# Altium PCB PCB3.PcbDoc
Units mm, origin at the board's own origin, x right, y up, seen from the top; angles counter-clockwise.
Board outline 152.4 x 101.6 mm, 2 copper layers (Top Layer, Bottom Layer); 32 components, 21 nets, 98 pads, 1 vias.
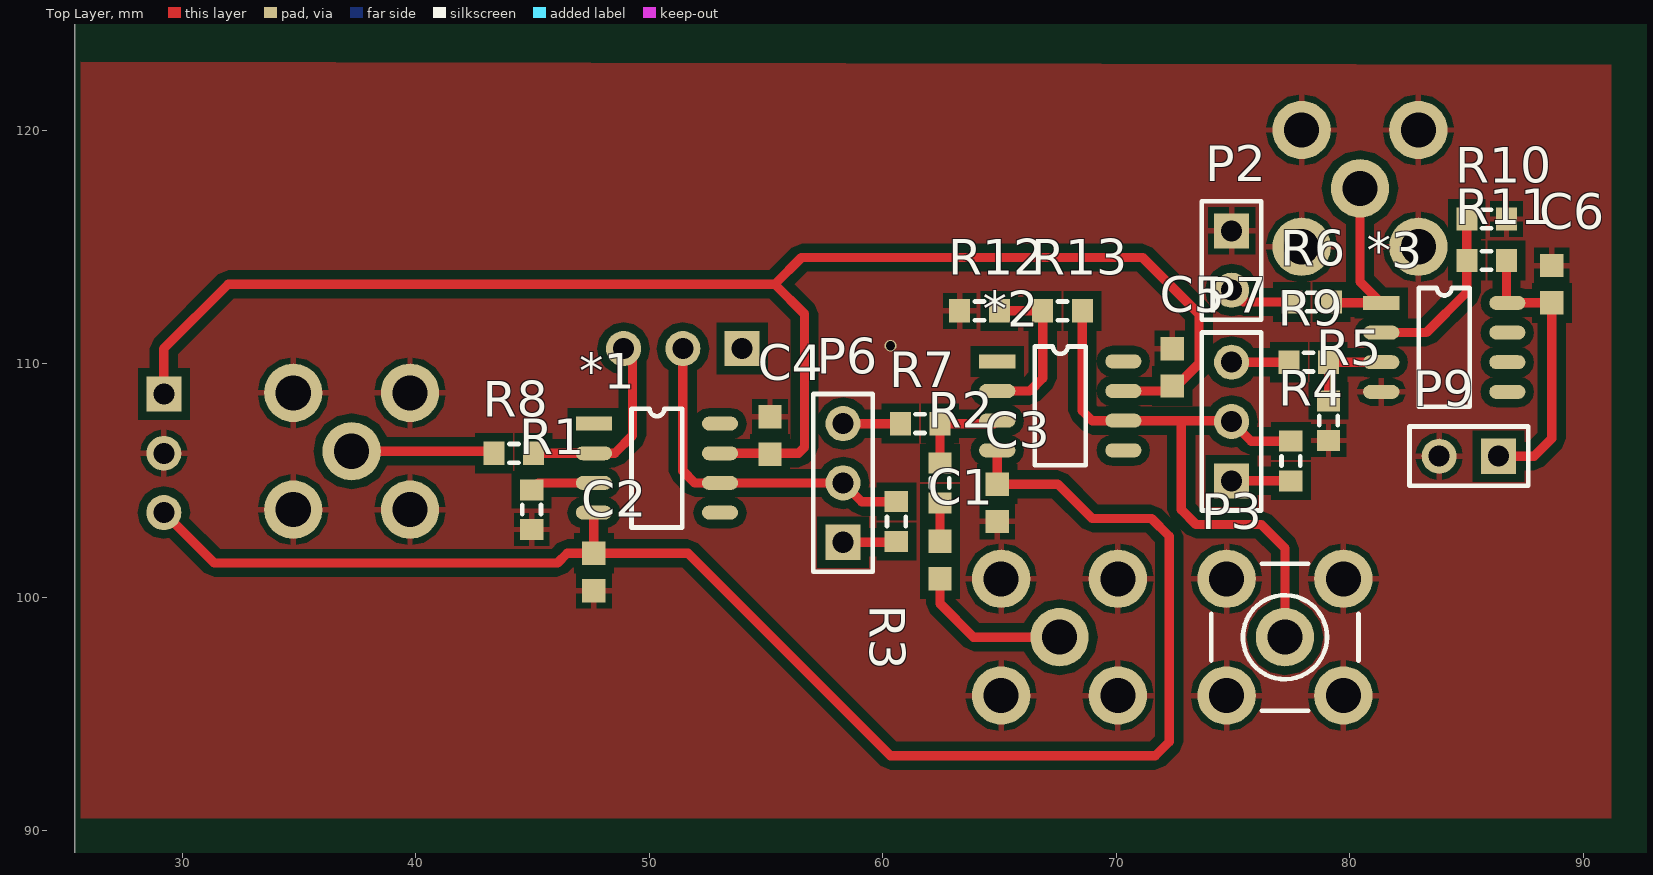
[diagram p0: Top Layer view]
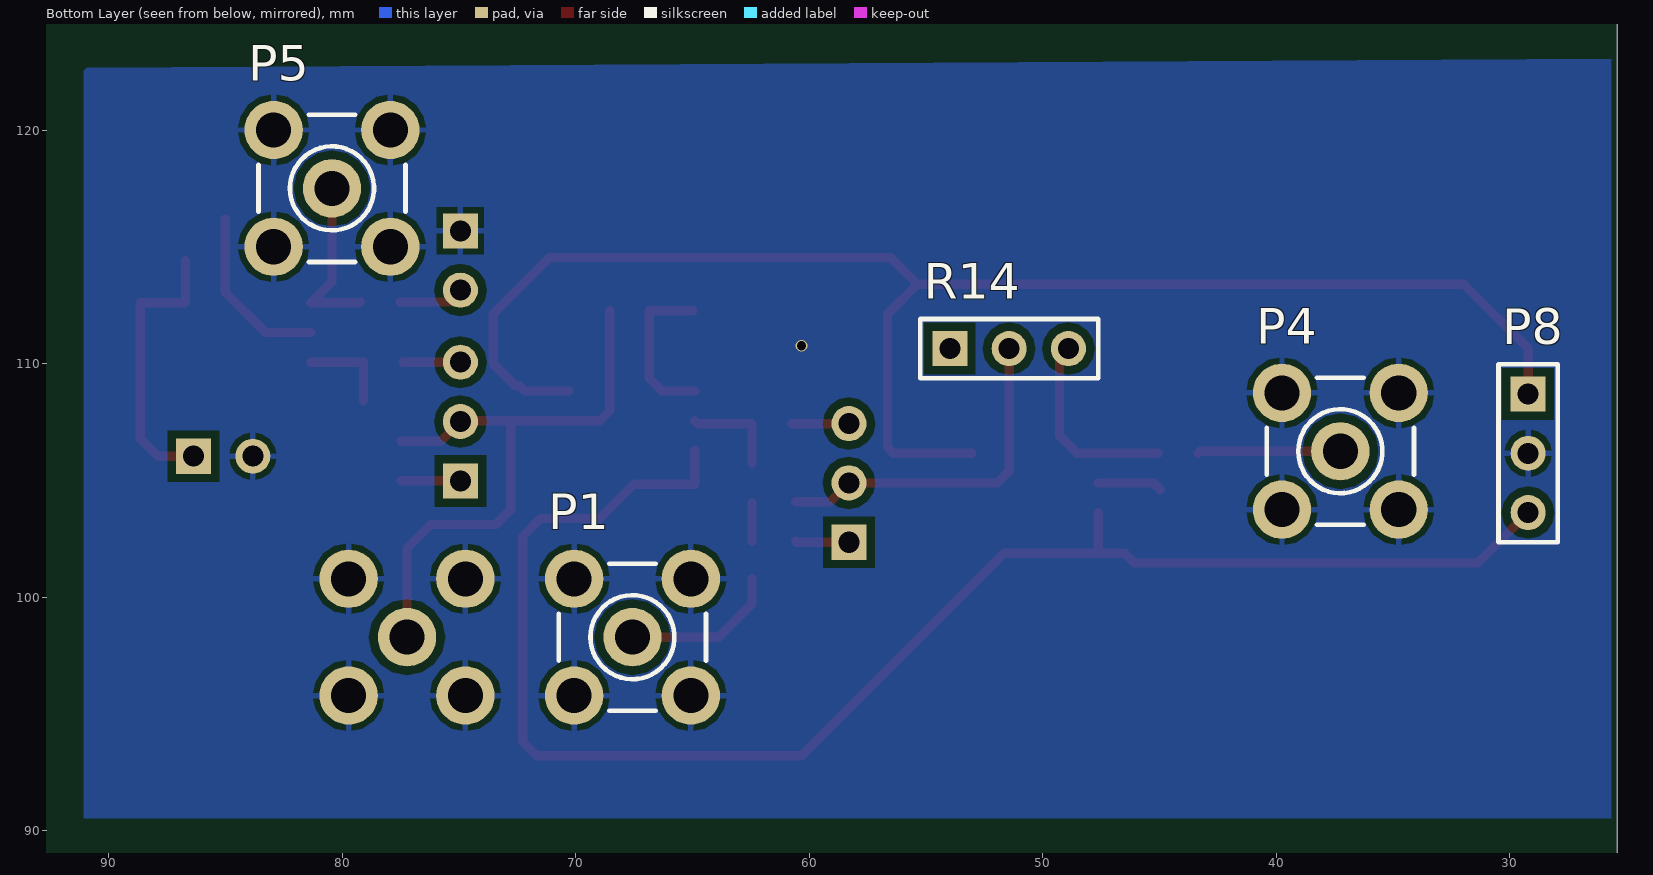
[diagram p1: Bottom Layer view, seen from below]

## Layer stack, top to bottom
Top Solder: solder mask 0.0102, Solder Resist, Dk 3.5
Top Layer: signal copper 0.0356
Dielectric 1: dielectric 0.32, FR-4, Dk 4.8
Bottom Layer: signal copper 0.0356
Bottom Solder: solder mask 0.0102, Solder Resist, Dk 3.5

## Board outline
25.4,25.4 177.8,25.4 177.8,127 25.4,127

## Design rules (kind name [scope] priority, off if disabled: settings)
Clearance [All] p1: gap=0.35 ignorepadtopadclearanceinfootprint=FALSE
PolygonConnect [All] p1: connectstyle=Relief reliefconductorwidth=0.254 reliefentries=4 polygonreliefangle="90 Angle" airgapwidth=0.254
RoutingVias [All] p1: holewidth=0.711 width=1.27 viastyle="Through Hole" minholewidth=0.711 minwidth=1.27 maxholewidth=0.711 maxwidth=1.27
SolderMaskExpansion [All] p1: expansion=0.102
Width [All] p1: maxlimit=0.8 minlimit=0.35 preferedwidth=0.4
30 further rules are at their usual default settings.

## Components (designator, comment, footprint, x,y, rotation, side; value= is the part's Value field where it differs from the comment)
*1 "OPA828" SOIC_8 47.625,107.442 r0 top
*2 "OPA828" SOIC_8 64.897,110.109 r0 top
*3 "TlV3202" SOIC_8 81.341,112.611 r0 top
C1 "Cap Semi" CAPC1608N 62.445,101.6 r90 top value=100pF
C2 "Cap Semi" CAPC1608N 47.625,101.092 r90 top value=100pF
C3 "Cap Semi" CAPC1608N 64.897,104.052 r270 top value=100pF
C4 "Cap Semi" CAPC1608N 55.167,106.934 r270 top value=100pF
C5 "Cap Semi" CAPC1608N 72.39,109.855 r90 top value=100pF
C6 "Cap Semi" CAPC1608N 88.646,113.411 r90 top value=100pF
P1 "SMB" SMB_V-RJ45 67.564,98.298 r180 bottom
P2 "Header 2" HDR1X2 74.93,115.697 r270 top
P3 "SMB" SMB_V-RJ45 77.216,98.298 r0 top
P4 "SMB" SMB_V-RJ45 37.251,106.259 r180 bottom
P5 "SMB" SMB_V-RJ45 80.431,117.515 r180 bottom
P6 "Header 3" HDR1X3 58.293,102.362 r90 top
P7 "Header 3" HDR1X3 74.93,104.991 r90 top
P8 "Header 3" HDR1X3 29.21,108.712 r270 bottom
P9 "Header 2H" HDR1X2 86.36,106.045 r180 top
R1 "Res Semi" RESC1608N 44.958,103.759 r90 top value=1K
R2 "Res Semi" RESC1608N 62.445,104.902 r90 top value=1K
R3 "Res Semi" RESC1608N 60.579,103.251 r270 top value=1K
R4 "Res Semi" RESC1608N 77.47,105.842 r270 top value=1K
R5 "Res Semi" RESC1608N 79.082,107.569 r90 top value=1K
R6 "Res Semi" RESC1608N 78.359,112.649 r0 top value=1K
R7 "Res Semi" RESC1608N 61.595,107.442 r0 top value=1K
R8 "Res Semi" RESC1608N 44.196,106.172 r0 top value=1K
R9 "Res Semi" RESC1608N 78.232,110.071 r0 top value=1K
R10 "Res Semi" RESC1608N 85.852,116.205 r180 top value=1K
R11 "Res Semi" RESC1608N 85.852,114.427 r0 top value=1K
R12 "Res Semi" RESC1608N 64.135,112.268 r0 top value=1K
R13 "Res Semi" RESC1608N 67.691,112.268 r0 top value=1K
R14 "Res Tap" HDR1X3 53.975,110.655 r180 bottom value=1K

## Footprints (in the part's own frame and the unit in brackets; to place one, negate y for a bottom-side part, rotate by r counter-clockwise, add the part's x,y. Pads: shape width x height; smd on the part's side, far side on the other; paste and mask are expansions set on the pad)
CAPC1608N [mm] "Chip Capacitor, Body 1.6x0.8mm, IPC Medium Density"
  rect 1x1 smd: 1(-0.8,0) 2(0.8,0)
  body extent -0.87,-0.48 0.87,0.48, height 0.85
HDR1X2 [mm] "Connector; Header; 2 Position"
  rect 1.5x1.5 hole 0.9: 1(0,0)
  round 1.5 hole 0.9: 2(2.54,0)
  silkscreen extent -1.27,-1.27 3.81,1.27
HDR1X3 [mm] "Connector; Header; 3 Position"
  rect 1.5x1.5 hole 0.9: 1(0,0)
  round 1.5 hole 0.9: 2(2.54,0) 3(5.08,0)
  silkscreen extent -1.27,-1.27 6.35,1.27
RESC1608N [mm] "Chip Resistor, Body 1.6x0.8mm, IPC Medium Density"
  rect 0.9x1 smd: 1(-0.85,0) 2(0.85,0)
  silkscreen extent -0.2,-0.4 0.2,0.4, body extent -0.85,-0.48 0.85,0.48, height 0.6
SMB_V-RJ45 [mm] "Connector; SMB Straight"
  round 2.5 hole 1.5: 1(0,0) 2(-2.5,-2.5) 2(-2.5,2.5) 2(2.5,-2.5) 2(2.5,2.5)
  silkscreen extent -3.15,-3.15 3.15,3.15
SOIC_8 [mm]
  rect 1.55x0.6 smd: 1(0,0)
  oval 1.55x0.6 smd: 2(0,-1.27) 3(0,-2.54) 4(0,-3.81) 5(5.4,-3.81) 6(5.4,-2.54) 7(5.4,-1.27) 8(5.4,0)
  silkscreen extent 1.61,-4.44 3.79,0.64

## Part data
C1 C2 C3 C4 C5 C6: "Capacitor (Semiconductor SIM Model)", LatestRevisionDate=29-May-2009, LatestRevisionNote="IPC-7351 Footprint Added.", PackageDescription="Chip Capacitor", PackageReference=C1206, Published=8-Jun-2000, Publisher="Altium Limited"
P1 P3 P4 P5: "SMB Straight Connector", LatestRevisionDate=17-Jul-2002, LatestRevisionNote="Re-released for DXP Platform.", Publisher="Altium Limited"
P2: "Header, 2-Pin", LatestRevisionDate=17-Jul-2002, LatestRevisionNote="Re-released for DXP Platform.", Publisher="Altium Limited"
P6 P7 P8: "Header, 3-Pin", LatestRevisionDate=17-Jul-2002, LatestRevisionNote="Re-released for DXP Platform.", Publisher="Altium Limited"
P9: "Header, 2-Pin, Right Angle", LatestRevisionDate=17-Jul-2002, LatestRevisionNote="Re-released for DXP Platform.", Publisher="Altium Limited"
R1 R2 R3 R4 R5 R6 R7 R8 R9 R10 R11 R12 R13: "Semiconductor Resistor", LatestRevisionDate=17-Jul-2002, LatestRevisionNote="Re-released for DXP Platform.", PackageDescription="Axial Device, Thru-Hole; 2 Leads; 0.5 in Pin Spacing", PackageReference=AXIAL-0.5, Published=8-Jun-2000, Publisher="Altium Limited"
R14: "Tapped Resistor", LatestRevisionDate=17-Jul-2002, LatestRevisionNote="Re-released for DXP Platform.", PackageDescription="Variable Resistor, Thru-Hole; 3 Leads", PackageReference=VR3, Published=24-Mar-1999, Publisher="Altium Limited", Set Position=0.5, Sim Note="Enter the Resistance value and the set point into parameter fields."

## Via types
v1: diameter 0.5, hole 0.4, Top Layer to Bottom Layer, 1 vias

## Nets (pads, with @x,y where several pads share a name; then routed paths per layer and width w, separated by ;. In a path a pad name is that pad's centre, name@x,y a point inside that pad or via, vN(x,y) a via of type N, cw(c..) or ccw(c..) an arc to the next point about the centre after c; other vN are vias at no path point)
5N0: *1.4 *2.4 C2.2 C3.1 P8.3 | length 68.2
  Top Layer w0.4: P8.3 31.369,101.473 46.063,101.473 46.482,101.892 C2.2 ; *1.4 C2.2 ; *2.4 C3.1 67.487,104.852 68.961,103.378 71.501,103.378 72.263,102.616 72.263,93.815 71.666,93.218 60.325,93.218 51.651,101.892 C2.2
5P0: *3.8 C6.1 P9.1 R11.2 | length 12.1
  Top Layer w0.4: P9.1 87.884,106.045 88.646,106.807 C6.1 *3.8 86.702,112.65 R11.2
25P0: *1.7 *2.7 C4.2 C5.1 P8.1 | length 66
  Top Layer w0.4: P8.1 29.21,110.655 31.966,113.411 55.372,113.411 ; *1.7 56.388,106.172 56.642,106.426 56.642,112.141 55.372,113.411 ; *2.7 72.174,108.839 C5.1 72.568,109.055 73.533,110.02 73.533,112.141 71.12,114.554 56.515,114.554 55.372,113.411
GND: *3.4 C2.1 C3.2 C4.1 C5.2 C6.2 P1.2 P2.1 P3.2 P4.2 P5.2 P8.2 P9.2 R1.1 R5.1 R10.1 R12.1
  other v1: 60.325,110.772
Net*1_2: *1.2 R8.2 R14.3 | length 8.4
  Top Layer w0.4: R8.2 *1.2 48.514,106.172 49.276,106.934 49.276,110.274 R14.3
Net*1_3: *1.3 R1.2 | length 2.8
  Top Layer w0.4: R1.2 45.251,104.902 *1.3
Net*1_6: *1.6 P6.2 R3.1 R14.2 | length 14.9
  Top Layer w0.4: R14.2 51.435,105.41 51.943,104.902 *1.6 P6.2 59.094,104.101 R3.1
Net*2_2: *2.2 R12.2 R13.1 | length 6.9
  Top Layer w0.4: *2.2 66.294,108.839 66.841,109.386 R13.1 R12.2
Net*2_3: *2.3 R2.2 R7.2 | length 4.2
  Top Layer w0.4: R2.2 R7.2 64.77,107.442 *2.3
Net*2_6: *2.6 P3.1 P7.2 R4.1 R13.2 | length 26.5
  Top Layer w0.4: R13.2 68.541,107.989 68.961,107.569 *2.6 72.771,107.569 ; P3.1 77.216,102.108 76.2,103.124 73.406,103.124 72.771,103.759 72.771,107.569 ; R4.1 75.769,106.692 P7.2 74.892,107.569 72.771,107.569
Net*3_1: *3.1 P5.1 R6.2 | length 7.4
  Top Layer w0.4: R6.2 79.247,112.611 *3.1 80.431,113.521 P5.1
Net*3_2: *3.2 R10.2 R11.1 | length 7.5
  Top Layer w0.4: *3.2 83.274,111.341 85.002,113.069 R11.1 R10.2
Net*3_3: *3.3 R5.2 R9.2 | length 3.9
  Top Layer w0.4: R5.2 R9.2 *3.3
NetC1_1: C1.1 P1.1 | length 6.8
  Top Layer w0.4: C1.1 62.445,99.734 63.881,98.298 P1.1
NetC1_2: C1.2 R2.1 | length 1.7
  Top Layer w0.4: C1.2 R2.1
NetP2_2: P2.2 R6.1 | length 2.8
  Top Layer w0.4: P2.2 75.438,112.649 R6.1
NetP4_1: P4.1 R8.1 | length 6.1
  Top Layer w0.4: P4.1 43.259,106.259 R8.1
NetP6_1: P6.1 R3.2 | length 2.3
  Top Layer w0.4: P6.1 60.54,102.362 R3.2
NetP6_3: P6.3 R7.1 | length 2.5
  Top Layer w0.4: P6.3 R7.1
NetP7_1: P7.1 R4.2 | length 2.5
  Top Layer w0.4: P7.1 R4.2 R4.2
NetP7_3: P7.3 R9.1 | length 2.5
  Top Layer w0.4: P7.3 R9.1
pads on no net: *1.1 *1.5 *1.8 *2.1 *2.5 *2.8 *3.5 *3.6 *3.7 R14.1

## Polygon pours and split planes (outlines as drawn)
GND on Top Layer "GND" (solid, remove dead copper, pour order 0): 91.186,122.809 91.186,90.551 25.654,90.551 25.654,122.936
GND on Bottom Layer "GND" (solid, remove dead copper, pour order 2): 25.654,123.063 25.654,90.551 91.059,90.551 91.059,122.555 90.932,122.682